# EAGLE board mini_optron (EAGLE 9.3.1)
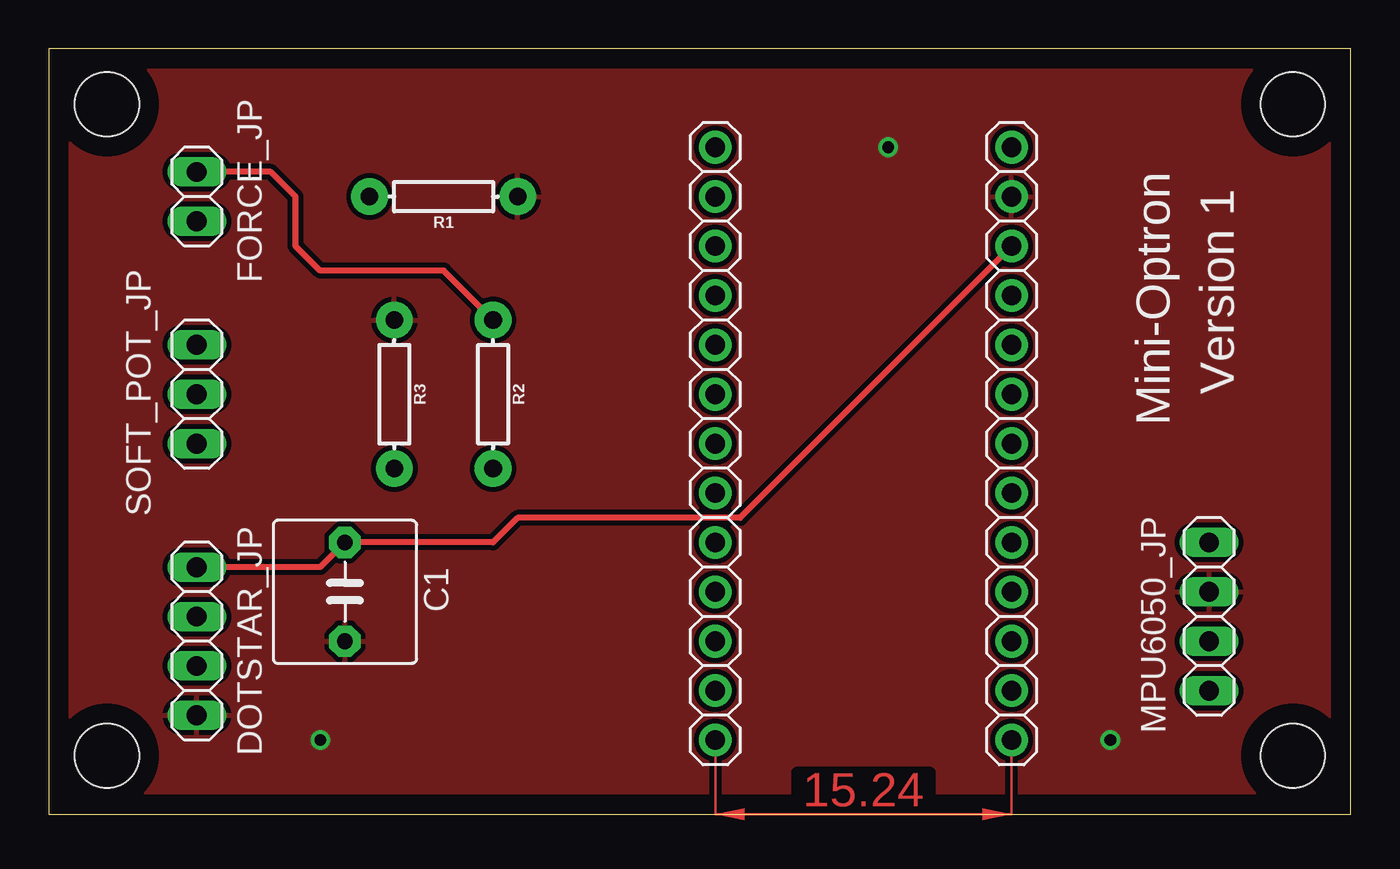
[diagram p0: board, top side]
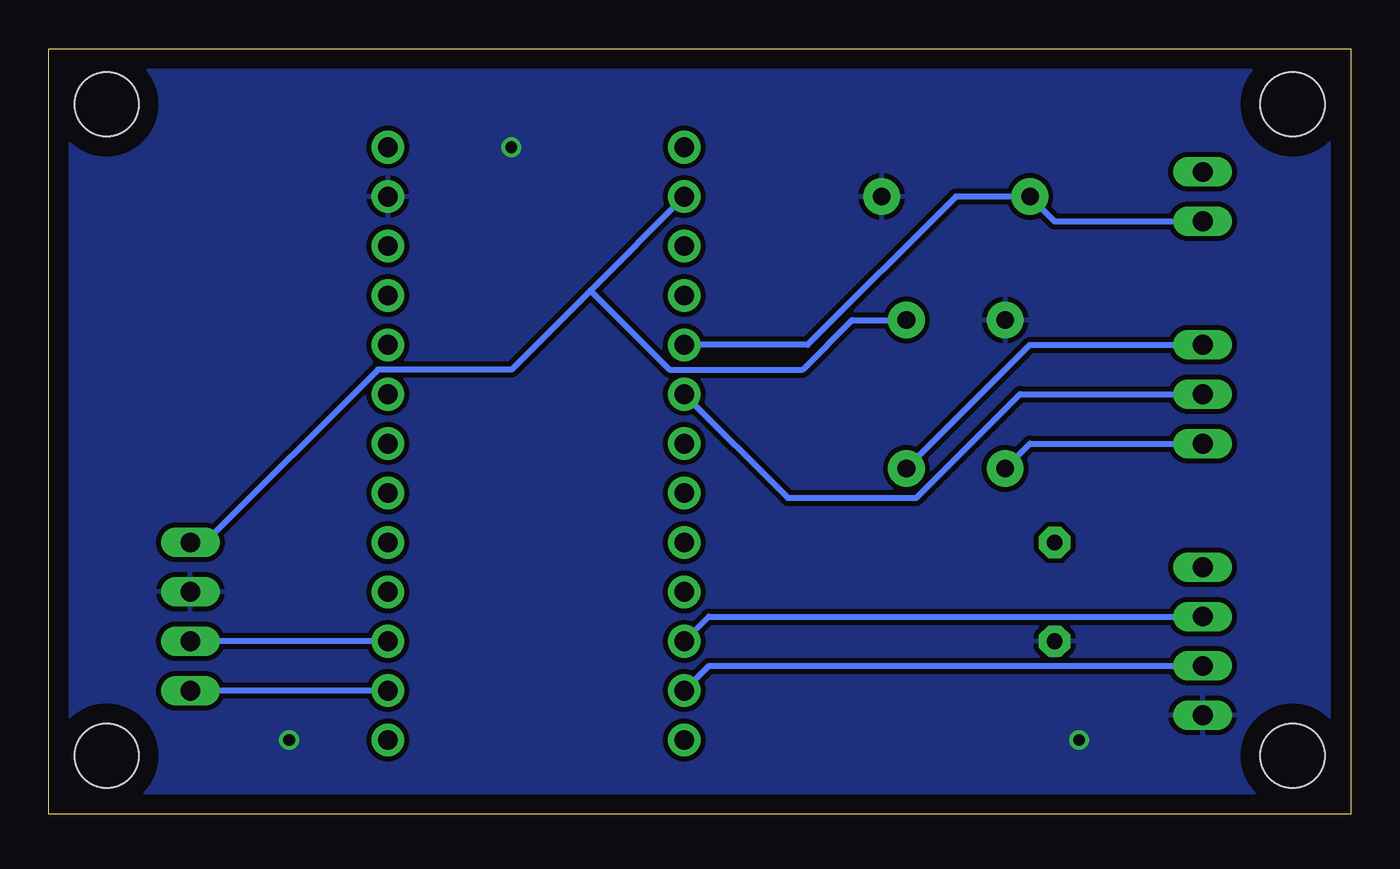
[diagram p1: board, bottom side, seen from below]

Size 66.98 x 39.36 mm. Coordinates in mm from the lower left corner, seen from the top.
Outline: 0,0 66.98,0 66.98,39.36 0,39.36 0,0
Copper layers (1*16): Top 0.035mm / dielectric 1.5mm / Bottom 0.035mm
Design rules "default": minimum track width 6mil, minimum drill 0.35mm, track to track 6mil, track to pad 6mil, pad to pad 6mil, via to via 6mil, smd to smd 6mil, copper to edge 40mil, drill to drill 6mil, minimum pad ring 10mil, minimum via ring 8mil, stop-mask expansion 4mil, vias tented up to drill 0mil, thermal gap 10mil
Net classes: 0 default: width 0.305 mm, drill 0.508 mm, clearance 0.254 mm
Holes 3.3 mm at 3,3 3,36.5 64,3 64,36.5

## Footprints (pad centres in the part's own frame; a part is rotated, then mirrored left to right if it is on the bottom)
C5B7.2 = drill 0.813 pad 1.6 octagon: 1 -2.54,0; 2 2.54,0
1X04 = drill 1.016 long: 1 -3.81,0; 2 -1.27,0; 3 1.27,0; 4 3.81,0
1X02 = drill 1.016 long: 1 -1.27,0; 2 1.27,0
1X13-BIG = drill 1.016 pad 1.676: 1 -15.24,0; 2 -12.7,0; 3 -10.16,0; 4 -7.62,0; 5 -5.08,0; 6 -2.54,0; 7 0,0; 8 2.54,0; 9 5.08,0; 10 7.62,0; 11 10.16,0; 12 12.7,0; 13 15.24,0
AXIAL-0.3 = drill 0.9 pad 1.88: P$1 -3.81,0; P$2 3.81,0
1X03 = drill 1.016 long: 1 -2.54,0; 2 0,0; 3 2.54,0

## Placement (x,y rotation side)
C1  1 uF  [C5B7.2]  15.24,11.43 270 top
DOTSTAR_JP  [1X04]  7.62,8.89 270 top
FORCE_JP  [1X02]  7.62,31.75 270 top
JP1  [1X13-BIG]  34.29,19.05 270 top
JP2  [1X13-BIG]  49.53,19.05 270 top
MPU6050_JP  [1X04]  59.69,10.16 270 top
R1  33k  [AXIAL-0.3]  20.32,31.75 180 top
R2  10k  [AXIAL-0.3]  22.86,21.59 270 top
R3  10k  [AXIAL-0.3]  17.78,21.59 270 top
SOFT_POT_JP  [1X03]  7.62,21.59 270 top

## Library data of the parts
C1 = capacitor-wima; MF: AVX; MPN: 0805YD105KAT2A; OC_NEWARK: 95W9236
DOTSTAR_JP FORCE_JP MPU6050_JP SOFT_POT_JP = pinhead
JP1 JP2 = adafruit; OC_NEWARK: unknown
R1-R3 = SparkFun-Resistors; MF: VISHAY; MPN: CRCW060310K0FKEA; OC_NEWARK: 52K8063

## Nets
CONN: FORCE_JP.1 JP1.2 MPU6050_JP.1 R2.P$1
GND: C1.2 DOTSTAR_JP.4 JP2.2 MPU6050_JP.2 R1.P$1 R3.P$1
N$1: FORCE_JP.2 JP1.5 R1.P$2
N$2: DOTSTAR_JP.2 JP1.11
N$3: R2.P$2 SOFT_POT_JP.1
N$4: JP1.6 SOFT_POT_JP.2
N$5: R3.P$2 SOFT_POT_JP.3
N$6: DOTSTAR_JP.3 JP1.12
N$9: JP2.11 MPU6050_JP.3
N$10: JP2.12 MPU6050_JP.4
VCC: C1.1 DOTSTAR_JP.1 JP2.3

## Tracks (layer width: path | path; a pad name or v marks a point on that pad's centre or on a via)
CONN
  Top 0.305: R2.P$1 20.32,27.94 13.97,27.94 12.7,29.21 12.7,31.75 11.43,33.02 FORCE_JP.1
  Bottom 0.305: MPU6050_JP.1 58.93,13.97 50.04,22.86 43.18,22.86 39.12,26.92 | JP1.2 39.12,26.92 | R2.P$1 25.65,25.4 28.19,22.86 35.05,22.86 39.12,26.92
GND  (via drill 0.6)
  other vias: 43.18,34.29 13.97,3.81 54.61,3.81
  pour Top: -1.27,40.64 -1.27,-1.27 68.58,-1.27 68.58,40.64
  pour Bottom: -1.27,40.64 -1.27,-1.27 68.58,-1.27 68.58,40.64
N$1
  Bottom 0.305: FORCE_JP.2 15.24,30.48 R1.P$2 20.32,31.75 27.94,24.13 JP1.5
N$2
  Bottom 0.305: DOTSTAR_JP.2 33.02,10.16 JP1.11
N$3
  Bottom 0.305: SOFT_POT_JP.1 16.51,24.13 R2.P$2
N$4
  Bottom 0.305: SOFT_POT_JP.2 17.02,21.59 22.35,16.26 28.96,16.26 JP1.6
N$5
  Bottom 0.305: SOFT_POT_JP.3 16.51,19.05 R3.P$2
N$6
  Bottom 0.305: DOTSTAR_JP.3 33.02,7.62 JP1.12
N$9
  Bottom 0.305: JP2.11 MPU6050_JP.3
N$10
  Bottom 0.305: JP2.12 MPU6050_JP.4
VCC
  Top 0.305: JP2.3 35.56,15.24 24.13,15.24 22.86,13.97 C1.1 13.97,12.7 DOTSTAR_JP.1
(copper drawn outside any net)
  shapes: Top area x1

## Text on the board
tPlace: Mini-Optron | Version 1